# Altium PCB Dual_Channel_Common_VCC_PCB_X4.PcbDoc
Units mm, origin at the board's own origin, x right, y up, seen from the top; angles counter-clockwise.
Board outline 83.69 x 66.17 mm, 2 copper layers (Top Layer, Bottom Layer); 36 components, 14 nets, 132 pads, 0 vias.
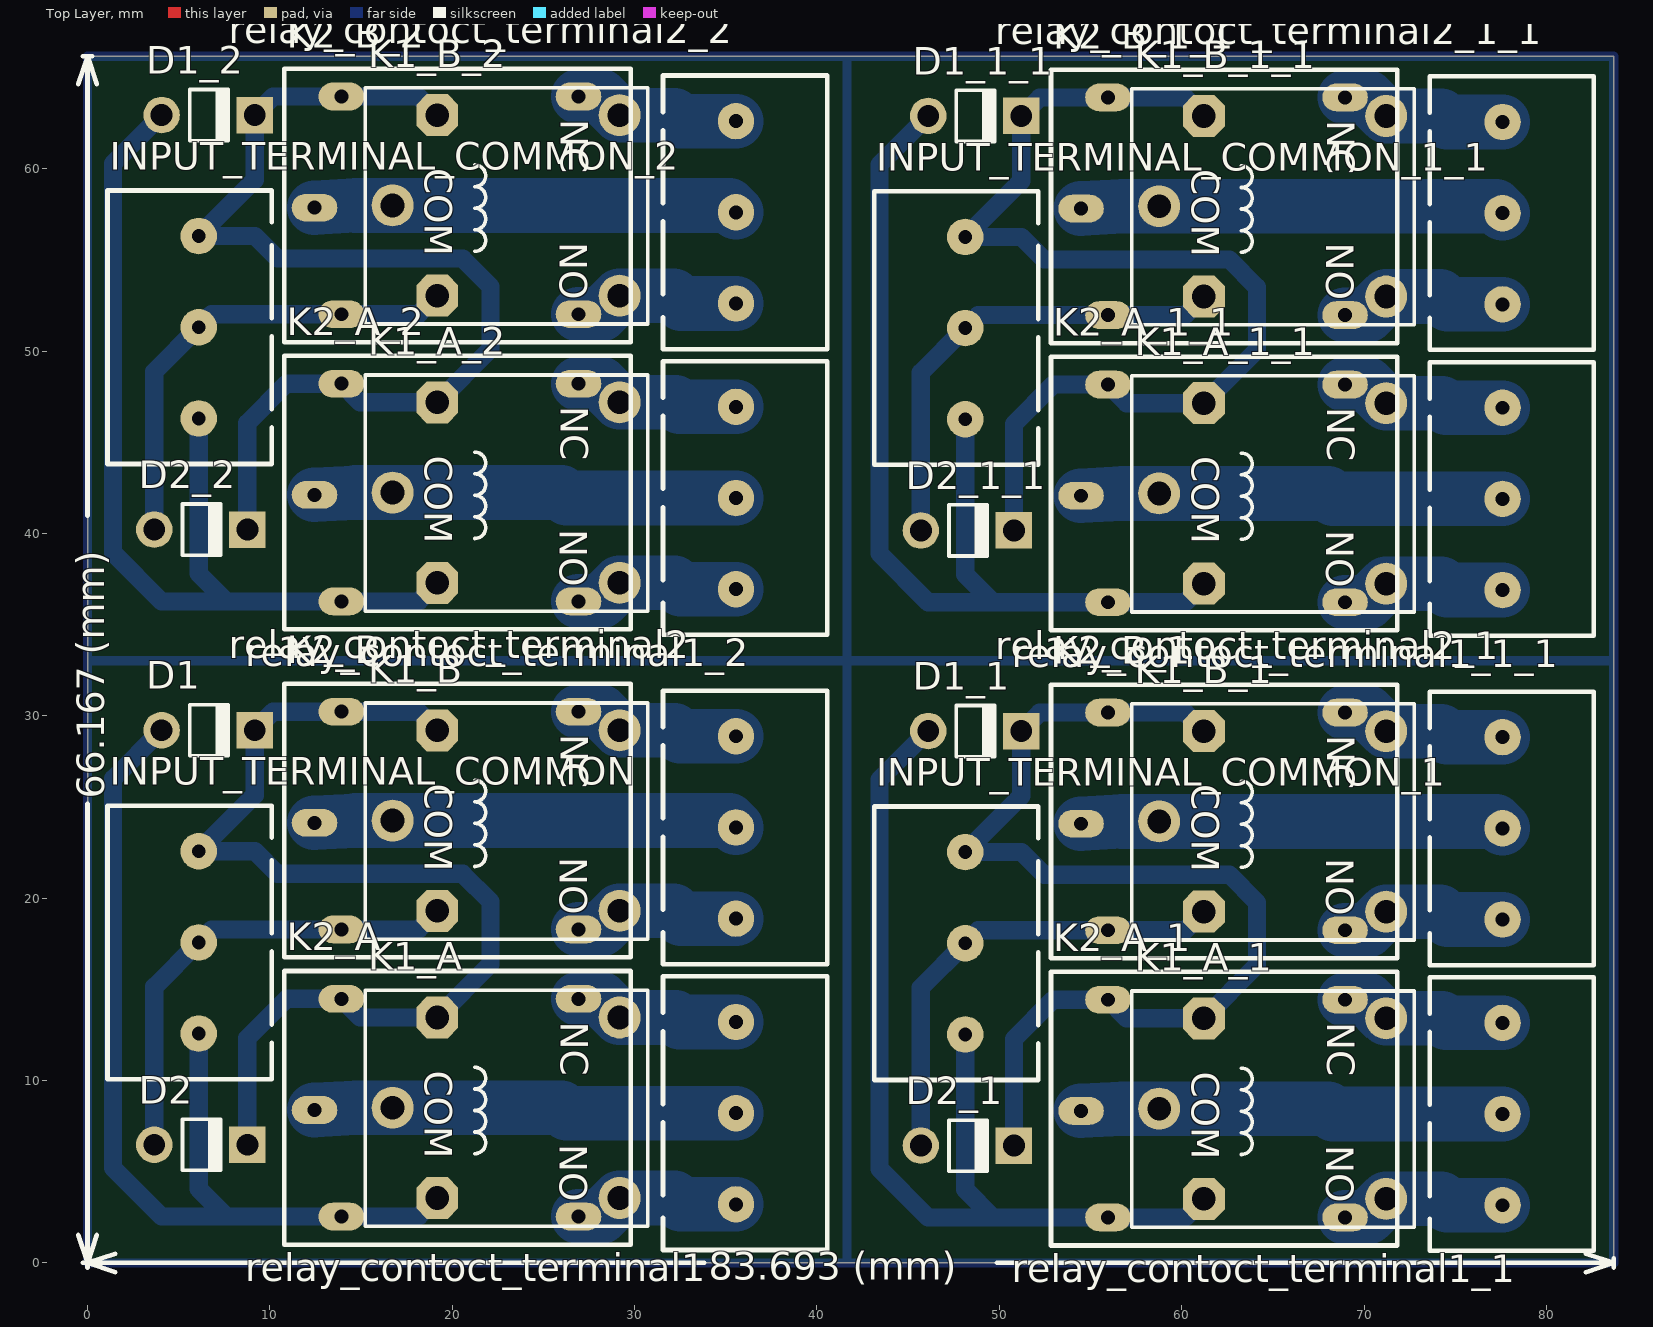
[diagram p0: Top Layer view]
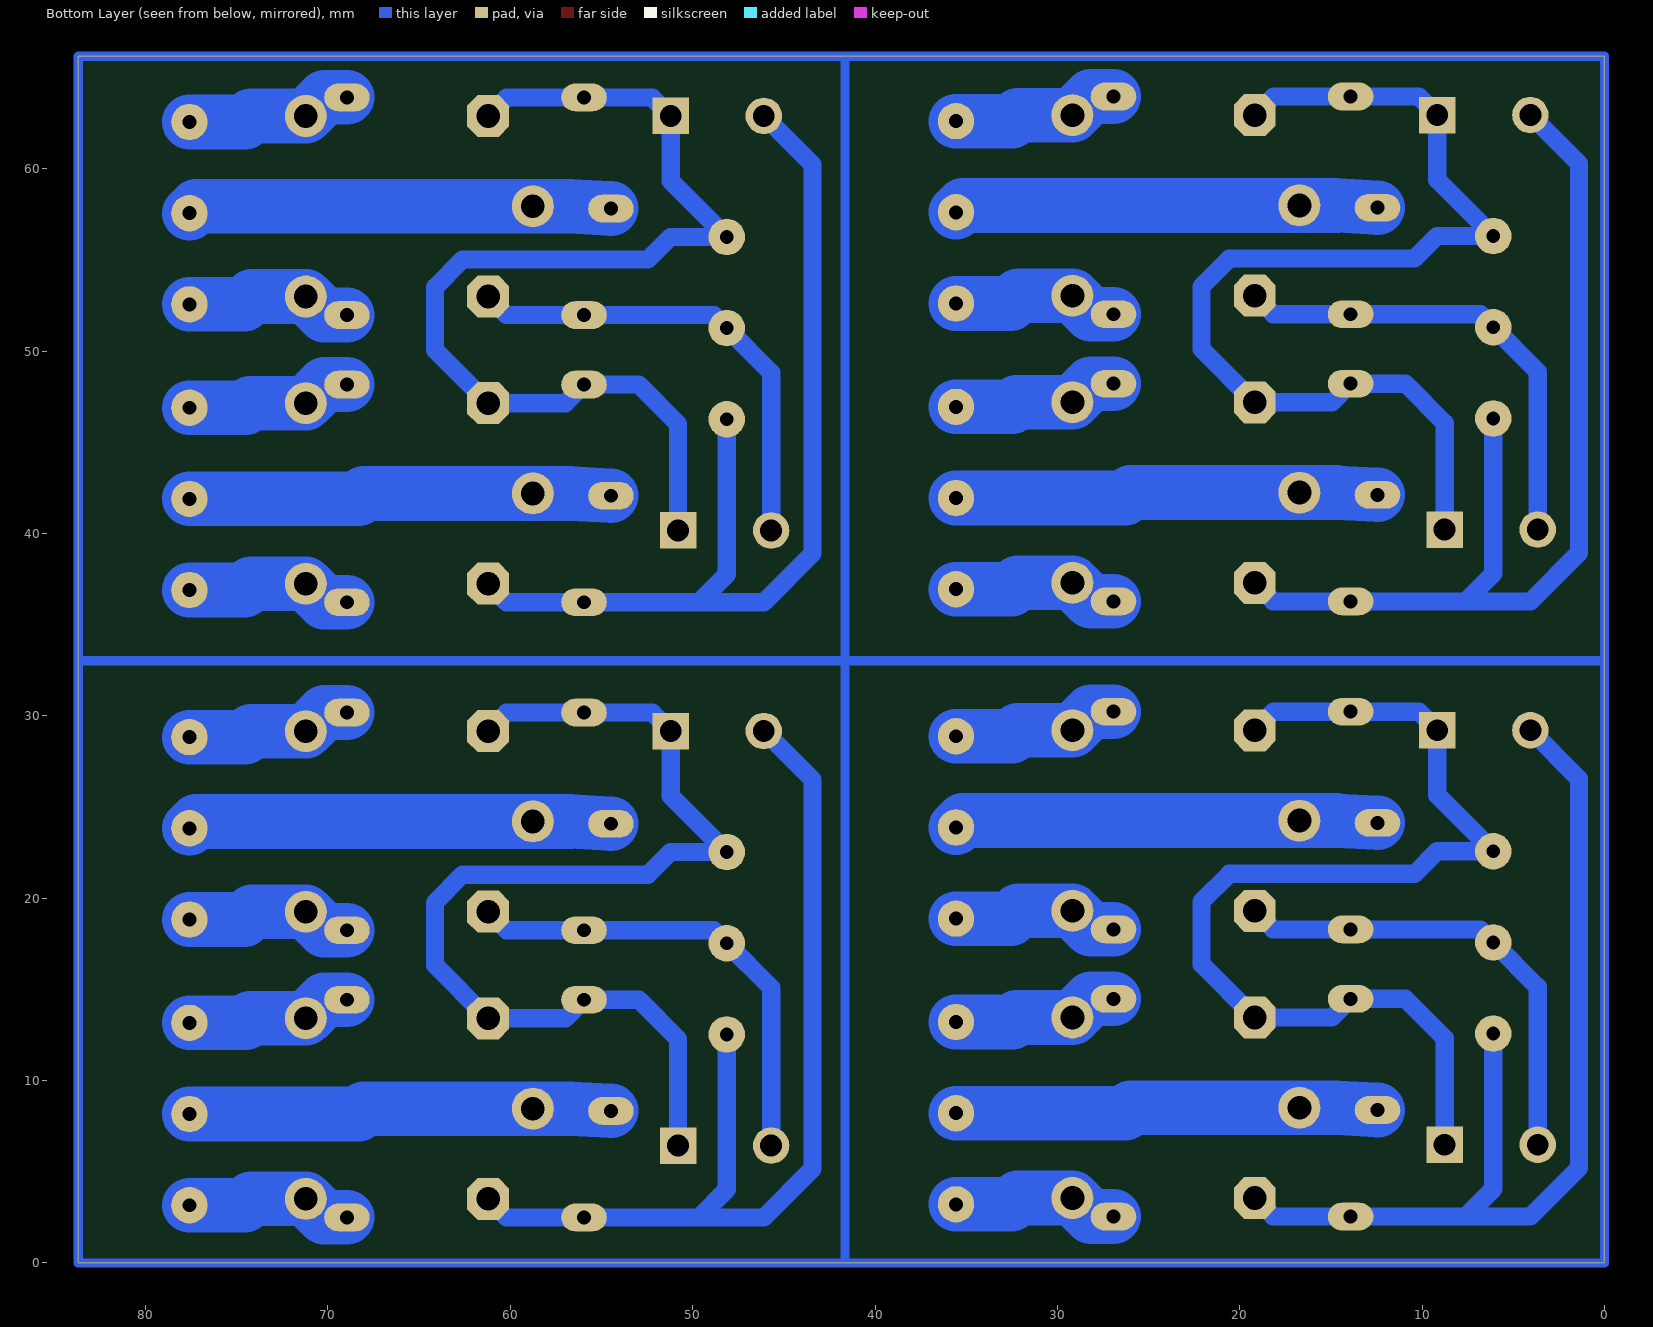
[diagram p1: Bottom Layer view, seen from below]

## Layer stack, top to bottom
Top Solder: solder mask 0.0102, Solder Resist, Dk 3.5
Top Layer: signal copper 0.0356
Dielectric 1: dielectric 0.32, FR-4, Dk 4.8
Bottom Layer: signal copper 0.0356
Bottom Solder: solder mask 0.0102, Solder Resist, Dk 3.5

## Board outline
0,0 0,66.167 83.693,66.167 83.693,0

## Design rules (kind name [scope] priority, off if disabled: settings)
Clearance [All] p1: gap=0.3 ignorepadtopadclearanceinfootprint=FALSE
PolygonConnect [All] p1: connectstyle=Relief reliefconductorwidth=0.254 reliefentries=4 polygonreliefangle="90 Angle" airgapwidth=0.254
RoutingLayers [All] p1: top layer_v5=FALSE bottom layer_v5=TRUE
RoutingVias [All] p1: holewidth=0.711 width=1.27 viastyle="Through Hole" minholewidth=0.711 minwidth=1.27 maxholewidth=0.711 maxwidth=1.27
SolderMaskExpansion [All] p1: expansion=0.102
Width [All] p1: maxlimit=1 minlimit=0.3 preferedwidth=0.5
29 further rules are at their usual default settings.

## Classes and differential pairs
component class Dual_Channel_Common_VCC: D1 D2 INPUT_TERMINAL_COMMON K1_A K1_B K2_A K2_B relay_contoct_terminal1 relay_contoct_terminal2

## Components (designator, comment, footprint, x,y, rotation, side; value= is the part's Value field where it differs from the comment)
D1 "Diode 1N4007 vertical" "D 50mm" 9.294,29.21 r0 top
D1_1 "Diode 1N4007 vertical" "D 50mm" 51.331,29.163 r0 top (schematic designator D1)
D1_1_1 "Diode 1N4007 vertical" "D 50mm" 51.331,62.898 r0 top (schematic designator D1)
D1_2 "Diode 1N4007 vertical" "D 50mm" 9.294,62.945 r0 top (schematic designator D1)
D2 "Diode 1N4007 vertical" "D 50mm" 8.89,6.477 r0 top
D2_1 "Diode 1N4007 vertical" "D 50mm" 50.927,6.43 r0 top (schematic designator D2)
D2_1_1 "Diode 1N4007 vertical" "D 50mm" 50.927,40.165 r0 top (schematic designator D2)
D2_2 "Diode 1N4007 vertical" "D 50mm" 8.89,40.212 r0 top (schematic designator D2)
INPUT_TERMINAL_COMMON "Terminal" "Terminal 1*3" 10.096,10.073 r90 top
INPUT_TERMINAL_COMMON_1 "Terminal" "Terminal 1*3" 52.133,10.026 r90 top (schematic designator INPUT_TERMINAL_COMMON)
INPUT_TERMINAL_COMMON_1_1 "Terminal" "Terminal 1*3" 52.133,43.761 r90 top (schematic designator INPUT_TERMINAL_COMMON)
INPUT_TERMINAL_COMMON_2 "Terminal" "Terminal 1*3" 10.096,43.808 r90 top (schematic designator INPUT_TERMINAL_COMMON)
K1_A "Relay" "Relay 15.40x12.10x13.10" 16.727,8.506 r270 top
K1_A_1 "Relay" "Relay 15.40x12.10x13.10" 58.764,8.459 r270 top (schematic designator K1_A)
K1_A_1_1 "Relay" "Relay 15.40x12.10x13.10" 58.764,42.194 r270 top (schematic designator K1_A)
K1_A_2 "Relay" "Relay 15.40x12.10x13.10" 16.727,42.241 r270 top (schematic designator K1_A)
K1_B "Relay" "Relay 15.40x12.10x13.10" 16.727,24.254 r270 top
K1_B_1 "Relay" "Relay 15.40x12.10x13.10" 58.764,24.207 r270 top (schematic designator K1_B)
K1_B_1_1 "Relay" "Relay 15.40x12.10x13.10" 58.764,57.942 r270 top (schematic designator K1_B)
K1_B_2 "Relay" "Relay 15.40x12.10x13.10" 16.727,57.989 r270 top (schematic designator K1_B)
K2_A "Relay-05vDC" Relays 10.795,16.002 r270 top
K2_A_1 "Relay-05vDC" Relays 52.832,15.955 r270 top (schematic designator K2_A)
K2_A_1_1 "Relay-05vDC" Relays 52.832,49.69 r270 top (schematic designator K2_A)
K2_A_2 "Relay-05vDC" Relays 10.795,49.737 r270 top (schematic designator K2_A)
K2_B "Relay-05vDC" Relays 10.795,31.75 r270 top
K2_B_1 "Relay-05vDC" Relays 52.832,31.703 r270 top (schematic designator K2_B)
K2_B_1_1 "Relay-05vDC" Relays 52.832,65.438 r270 top (schematic designator K2_B)
K2_B_2 "Relay-05vDC" Relays 10.795,65.485 r270 top (schematic designator K2_B)
relay_contoct_terminal1 "Terminal" "Terminal 1*3" 31.56,15.708 r270 top
relay_contoct_terminal1_1 "Terminal" "Terminal 1*3" 73.597,15.661 r270 top (schematic designator relay_contoct_terminal1)
relay_contoct_terminal1_1_1 "Terminal" "Terminal 1*3" 73.597,49.396 r270 top (schematic designator relay_contoct_terminal1)
relay_contoct_terminal1_2 "Terminal" "Terminal 1*3" 31.56,49.443 r270 top (schematic designator relay_contoct_terminal1)
relay_contoct_terminal2 "Terminal" "Terminal 1*3" 31.56,31.376 r270 top
relay_contoct_terminal2_1 "Terminal" "Terminal 1*3" 73.597,31.329 r270 top (schematic designator relay_contoct_terminal2)
relay_contoct_terminal2_1_1 "Terminal" "Terminal 1*3" 73.597,65.064 r270 top (schematic designator relay_contoct_terminal2)
relay_contoct_terminal2_2 "Terminal" "Terminal 1*3" 31.56,65.111 r270 top (schematic designator relay_contoct_terminal2)

## Footprints (in the part's own frame and the unit in brackets; to place one, negate y for a bottom-side part, rotate by r counter-clockwise, add the part's x,y. Pads: shape width x height; smd on the part's side, far side on the other; paste and mask are expansions set on the pad)
"D 50mm" [mm] "50mm Pin Spacing"
  round 2 hole 1.2: 1(-5.23,0)
  rect 2x2 hole 1.2: 2(-0.127,0)
  silkscreen extent -3.68,-1.4 -1.49,1.4
"Relay 15.40x12.10x13.10" [mm]
  round 2.3 hole 1.3: 1(0,0) 2(-4.95,12.45) 3(4.95,12.45)
  oct 2.3x2.3 hole 1.3: 4(-4.95,2.45) 5(4.95,2.45)
  silkscreen extent -6.45,-1.5 6.5,14, body extent -6.05,-1.3 6.05,14, height 15.6
Relays [mil]
  oval 60x98.43 hole 30: 1(300,65) 2(60,635) 3(530,635) 4(60,123.11) 5(530,123.11)
  silkscreen extent 0,0 591,748
"Terminal 1*3" [mm]
  round 2 hole 0.762: 1(2.5,4) 2(7.5,4) 3(12.5,4)
  silkscreen extent 0,0 15,9

## Part data
D1 D1_1 D1_1_1 D1_2 D2 D2_1 D2_1_1 D2_2: "1 Amp General Purpose Rectifier", Publisher="seyed mohsen ghasemian"
INPUT_TERMINAL_COMMON INPUT_TERMINAL_COMMON_1 INPUT_TERMINAL_COMMON_1_1 INPUT_TERMINAL_COMMON_2 relay_contoct_terminal1 relay_contoct_terminal1_1 relay_contoct_terminal1_1_1 relay_contoct_terminal1_2 relay_contoct_terminal2 relay_contoct_terminal2_1 relay_contoct_terminal2_1_1 relay_contoct_terminal2_2: library part "Terminal 1*3", "Terminal 3 Pin 250VAC 16A", ComponentLinkURL=www.picpars.com, Designer="Seyed Mohsen Ghasemain", E-mail=picpars@gmail.com
K1_A K1_A_1 K1_A_1_1 K1_A_2 K1_B K1_B_1 K1_B_1_1 K1_B_2: "SPDT Relay", Company=E.P.I.L, Design_Date=2011/10/31, Designer="Eng. Saeid Jorablo"
K2_A K2_A_1 K2_A_1_1 K2_A_2 K2_B K2_B_1 K2_B_1_1 K2_B_2: "Relay-05vDC-240AC 5A", ComponentLinkURL=www.picpars.com, Designer="Seyed Mohsen Ghasemain"

## Nets (pads, with @x,y where several pads share a name; then routed paths per layer and width w, separated by ;. In a path a pad name is that pad's centre, name@x,y a point inside that pad or via, vN(x,y) a via of type N, cw(c..) or ccw(c..) an arc to the next point about the centre after c; other vN are vias at no path point)
GND: 
NetD1_1: D1.1 INPUT_TERMINAL_COMMON.1 K1_A.5 K2_A.5 | length 55.1
  Bottom Layer w1: D1.1 1.397,26.543 1.397,5.207 4.064,2.54 7.62,2.54 ; INPUT_TERMINAL_COMMON.1 6.096,4.064 7.62,2.54 ; K1_A.5 18.161,2.54 K2_A.5 7.62,2.54
NetD2_1: D2.1 INPUT_TERMINAL_COMMON.2 K1_B.5 K2_B.5 | length 25.9
  Bottom Layer w1: D2.1 3.66,15.137 INPUT_TERMINAL_COMMON.2 6.811,18.288 K2_B.5 18.161,18.288 K1_B.5
NetK1_A_1: K1_A.1 K2_A.1 relay_contoct_terminal1.2 | length 23.2
  Bottom Layer w0.5: 25.984,8.506 26.282,8.208
  Bottom Layer w3: K2_A.1 14.704,8.506 K1_A.1 25.984,8.506 ; 26.282,8.208 relay_contoct_terminal1.2
NetK1_A_2: K1_A.2 K2_A.2 relay_contoct_terminal1.1 | length 9.2
  Bottom Layer w3: K2_A.2 28.155,14.478 K1_A.2 32.233,13.456 32.481,13.208 relay_contoct_terminal1.1
NetK1_A_3: K1_A.3 K2_A.3 relay_contoct_terminal1.3 | length 9.2
  Bottom Layer w0.5: 32.182,3.556 32.53,3.208
  Bottom Layer w3: K2_A.3 28.161,2.54 K1_A.3 32.182,3.556 ; 32.53,3.208 relay_contoct_terminal1.3
NetK1_B_1: K1_B.1 K2_B.1 relay_contoct_terminal2.2 | length 23.3
  Bottom Layer w3: K2_B.1 14.704,24.254 K1_B.1 35.182,24.254 relay_contoct_terminal2.2
NetK1_B_2: K1_B.2 K2_B.2 relay_contoct_terminal2.1 | length 9.2
  Bottom Layer w0.5: 32.182,29.204 32.51,28.876
  Bottom Layer w3: K2_B.2 28.155,30.226 K1_B.2 32.182,29.204 ; 32.51,28.876 relay_contoct_terminal2.1
NetK1_B_3: K1_B.3 K2_B.3 relay_contoct_terminal2.3 | length 9.2
  Bottom Layer w3: K2_B.3 28.161,18.288 K1_B.3 32.131,19.304 32.559,18.876 relay_contoct_terminal2.3
NetK2_1: 
NetK2_2: 
NetK2_3: 
NetLED_1: 
VCC: D1.2 D2.2 INPUT_TERMINAL_COMMON.3 K1_A.4 K1_B.4 K2_A.4 K2_B.4 | length 61
  Bottom Layer w1: D2.2 8.763,12.319 10.922,14.478 K2_A.4 14.944,13.456 K1_A.4 22.098,16.377 22.098,19.812 20.574,21.336 10.414,21.336 9.177,22.573 INPUT_TERMINAL_COMMON.3 9.167,25.644 D1.2 10.183,30.226 K2_B.4 18.155,30.226 K1_B.4
pads on no net: D1_1.1 D1_1.2 D1_1_1.1 D1_1_1.2 D1_2.1 D1_2.2 D2_1.1 D2_1.2 D2_1_1.1 D2_1_1.2 D2_2.1 D2_2.2 INPUT_TERMINAL_COMMON_1.1 INPUT_TERMINAL_COMMON_1.2 INPUT_TERMINAL_COMMON_1.3 INPUT_TERMINAL_COMMON_1_1.1 INPUT_TERMINAL_COMMON_1_1.2 INPUT_TERMINAL_COMMON_1_1.3 INPUT_TERMINAL_COMMON_2.1 INPUT_TERMINAL_COMMON_2.2 INPUT_TERMINAL_COMMON_2.3 K1_A_1.1 K1_A_1.2 K1_A_1.3 K1_A_1.4 K1_A_1.5 K1_A_1_1.1 K1_A_1_1.2 K1_A_1_1.3 K1_A_1_1.4 K1_A_1_1.5 K1_A_2.1 K1_A_2.2 K1_A_2.3 K1_A_2.4 K1_A_2.5 K1_B_1.1 K1_B_1.2 K1_B_1.3 K1_B_1.4 K1_B_1.5 K1_B_1_1.1 K1_B_1_1.2 K1_B_1_1.3 K1_B_1_1.4 K1_B_1_1.5 K1_B_2.1 K1_B_2.2 K1_B_2.3 K1_B_2.4 K1_B_2.5 K2_A_1.1 K2_A_1.2 K2_A_1.3 K2_A_1.4 K2_A_1.5 K2_A_1_1.1 K2_A_1_1.2 K2_A_1_1.3 K2_A_1_1.4 K2_A_1_1.5 K2_A_2.1 K2_A_2.2 K2_A_2.3 K2_A_2.4 K2_A_2.5 K2_B_1.1 K2_B_1.2 K2_B_1.3 K2_B_1.4 K2_B_1.5 K2_B_1_1.1 K2_B_1_1.2 K2_B_1_1.3 K2_B_1_1.4 K2_B_1_1.5 K2_B_2.1 K2_B_2.2 K2_B_2.3 K2_B_2.4 K2_B_2.5 relay_contoct_terminal1_1.1 relay_contoct_terminal1_1.2 relay_contoct_terminal1_1.3 relay_contoct_terminal1_1_1.1 relay_contoct_terminal1_1_1.2 relay_contoct_terminal1_1_1.3 relay_contoct_terminal1_2.1 relay_contoct_terminal1_2.2 relay_contoct_terminal1_2.3 relay_contoct_terminal2_1.1 relay_contoct_terminal2_1.2 relay_contoct_terminal2_1.3 relay_contoct_terminal2_1_1.1 relay_contoct_terminal2_1_1.2 relay_contoct_terminal2_1_1.3 relay_contoct_terminal2_2.1 relay_contoct_terminal2_2.2 relay_contoct_terminal2_2.3
copper on no net: | length 1125.6
  Bottom Layer w0.5: 0,33.02 41.656,33.02 83.693,33.02 ; 25.984,42.241 26.282,41.943 ; 32.182,37.291 32.53,36.943 ; 32.182,62.939 32.51,62.611 ; 41.656,0 41.656,66.167 ; 68.021,8.459 68.319,8.161 ; 68.021,42.194 68.319,41.896 ; 74.219,3.509 74.567,3.161 ; 74.219,29.157 74.547,28.829 ; 74.219,37.244 74.567,36.896 ; 74.219,62.892 74.547,62.564 ; 0,0 83.693,0 83.693,66.167 0,66.167 0,0
  Bottom Layer w1: 3.66,40.212 3.66,48.872 6.096,51.308 6.811,52.023 13.922,52.023 18.161,52.023 19.177,53.039 ; 4.064,62.945 1.397,60.278 1.397,38.942 4.064,36.275 7.62,36.275 ; 6.096,46.308 6.096,37.799 7.62,36.275 ; 8.763,40.212 8.763,46.054 10.922,48.213 13.922,48.213 14.944,47.191 19.177,47.191 22.098,50.112 22.098,53.547 20.574,55.071 10.414,55.071 9.177,56.308 6.096,56.308 9.167,59.379 9.167,62.945 10.183,63.961 13.922,63.961 18.155,63.961 19.177,62.939 ; 19.177,37.291 18.161,36.275 13.922,36.275 7.62,36.275 ; 45.697,6.43 45.697,15.09 48.133,17.526 48.848,18.241 55.959,18.241 60.198,18.241 61.214,19.257 ; 45.697,40.165 45.697,48.825 48.133,51.261 48.848,51.976 55.959,51.976 60.198,51.976 61.214,52.992 ; 46.101,29.163 43.434,26.496 43.434,5.16 46.101,2.493 49.657,2.493 ; 46.101,62.898 43.434,60.231 43.434,38.895 46.101,36.228 49.657,36.228 ; 48.133,12.526 48.133,4.017 49.657,2.493 ; 48.133,46.261 48.133,37.752 49.657,36.228 ; 50.8,6.43 50.8,12.272 52.959,14.431 55.959,14.431 56.981,13.409 61.214,13.409 64.135,16.33 64.135,19.765 62.611,21.289 52.451,21.289 51.214,22.526 48.133,22.526 51.204,25.597 51.204,29.163 52.22,30.179 55.959,30.179 60.192,30.179 61.214,29.157 ; 50.8,40.165 50.8,46.007 52.959,48.166 55.959,48.166 56.981,47.144 61.214,47.144 64.135,50.065 64.135,53.5 62.611,55.024 52.451,55.024 51.214,56.261 48.133,56.261 51.204,59.332 51.204,62.898 52.22,63.914 55.959,63.914 60.192,63.914 61.214,62.892 ; 61.214,3.509 60.198,2.493 55.959,2.493 49.657,2.493 ; 61.214,37.244 60.198,36.228 55.959,36.228 49.657,36.228
  Bottom Layer w3: 12.446,42.117 14.704,42.241 16.727,42.241 25.984,42.241 ; 12.446,57.865 14.704,57.989 16.727,57.989 35.182,57.989 35.56,57.611 ; 26.282,41.943 35.56,41.943 ; 26.924,36.275 28.161,36.275 29.177,37.291 32.182,37.291 ; 26.924,48.213 28.155,48.213 29.177,47.191 32.233,47.191 32.481,46.943 35.56,46.943 ; 26.924,52.023 28.161,52.023 29.177,53.039 32.131,53.039 32.559,52.611 35.56,52.611 ; 26.924,63.961 28.155,63.961 29.177,62.939 32.182,62.939 ; 32.51,62.611 35.56,62.611 ; 32.53,36.943 35.56,36.943 ; 54.483,8.335 56.741,8.459 58.764,8.459 68.021,8.459 ; 54.483,24.083 56.741,24.207 58.764,24.207 77.219,24.207 77.597,23.829 ; 54.483,42.07 56.741,42.194 58.764,42.194 68.021,42.194 ; 54.483,57.818 56.741,57.942 58.764,57.942 77.219,57.942 77.597,57.564 ; 68.319,8.161 77.597,8.161 ; 68.319,41.896 77.597,41.896 ; 68.961,2.493 70.198,2.493 71.214,3.509 74.219,3.509 ; 68.961,14.431 70.192,14.431 71.214,13.409 74.27,13.409 74.518,13.161 77.597,13.161 ; 68.961,18.241 70.198,18.241 71.214,19.257 74.168,19.257 74.596,18.829 77.597,18.829 ; 68.961,30.179 70.192,30.179 71.214,29.157 74.219,29.157 ; 68.961,36.228 70.198,36.228 71.214,37.244 74.219,37.244 ; 68.961,48.166 70.192,48.166 71.214,47.144 74.27,47.144 74.518,46.896 77.597,46.896 ; 68.961,51.976 70.198,51.976 71.214,52.992 74.168,52.992 74.596,52.564 77.597,52.564 ; 68.961,63.914 70.192,63.914 71.214,62.892 74.219,62.892 ; 74.547,28.829 77.597,28.829 ; 74.547,62.564 77.597,62.564 ; 74.567,3.161 77.597,3.161 ; 74.567,36.896 77.597,36.896

## Silkscreen, mask and mechanical layers (free items; w line width, h text height)
Top Overlay:
  lines w0.254: -0.508,1.524 0,0 ; -0.508,64.643 0,66.167 ; -0.254,0 0.254,0 ; -0.254,66.167 0.254,66.167 ; 0,-0.254 0,0.254 ; 0,25.187 0,0 ; 0,40.98 0,66.167 ; 0.508,1.524 0,0 ; 0.508,64.643 0,66.167 ; 1.524,-0.508 0,0 ; 1.524,0.508 0,0 ; 33.823,0 0,0 ; 49.87,0 83.693,0 ; 82.169,-0.508 83.693,0 ; 82.169,0.508 83.693,0 ; 83.693,-0.254 83.693,0.254
  text "66.167 (mm)" at 0.914,25.441 h1.52 r90
  text "83.693 (mm)" at 34.077,-0.914 h1.52

## Text inside footprints (layer, text, board x,y; h text height)
K1_A: Top Overlay "COM" at 18.505,10.538 h1.5 r270; Top Overlay "NO" at 25.896,6.499 h1.5 r270; Top Overlay "NC" at 25.947,13.23 h1.5 r270
K1_A_1: Top Overlay "COM" at 60.542,10.491 h1.5 r270; Top Overlay "NO" at 67.933,6.452 h1.5 r270; Top Overlay "NC" at 67.984,13.183 h1.5 r270
K1_A_1_1: Top Overlay "COM" at 60.542,44.226 h1.5 r270; Top Overlay "NO" at 67.933,40.187 h1.5 r270; Top Overlay "NC" at 67.984,46.918 h1.5 r270
K1_A_2: Top Overlay "COM" at 18.505,44.273 h1.5 r270; Top Overlay "NO" at 25.896,40.234 h1.5 r270; Top Overlay "NC" at 25.947,46.965 h1.5 r270
K1_B: Top Overlay "COM" at 18.505,26.286 h1.5 r270; Top Overlay "NO" at 25.896,22.247 h1.5 r270; Top Overlay "NC" at 25.947,28.978 h1.5 r270
K1_B_1: Top Overlay "COM" at 60.542,26.239 h1.5 r270; Top Overlay "NO" at 67.933,22.2 h1.5 r270; Top Overlay "NC" at 67.984,28.931 h1.5 r270
K1_B_1_1: Top Overlay "COM" at 60.542,59.974 h1.5 r270; Top Overlay "NO" at 67.933,55.935 h1.5 r270; Top Overlay "NC" at 67.984,62.666 h1.5 r270
K1_B_2: Top Overlay "COM" at 18.505,60.021 h1.5 r270; Top Overlay "NO" at 25.896,55.982 h1.5 r270; Top Overlay "NC" at 25.947,62.713 h1.5 r270